# EAGLE board SparkFun_Soil_Moisture_Sensor_Panel_v10 (EAGLE 7.3.0)
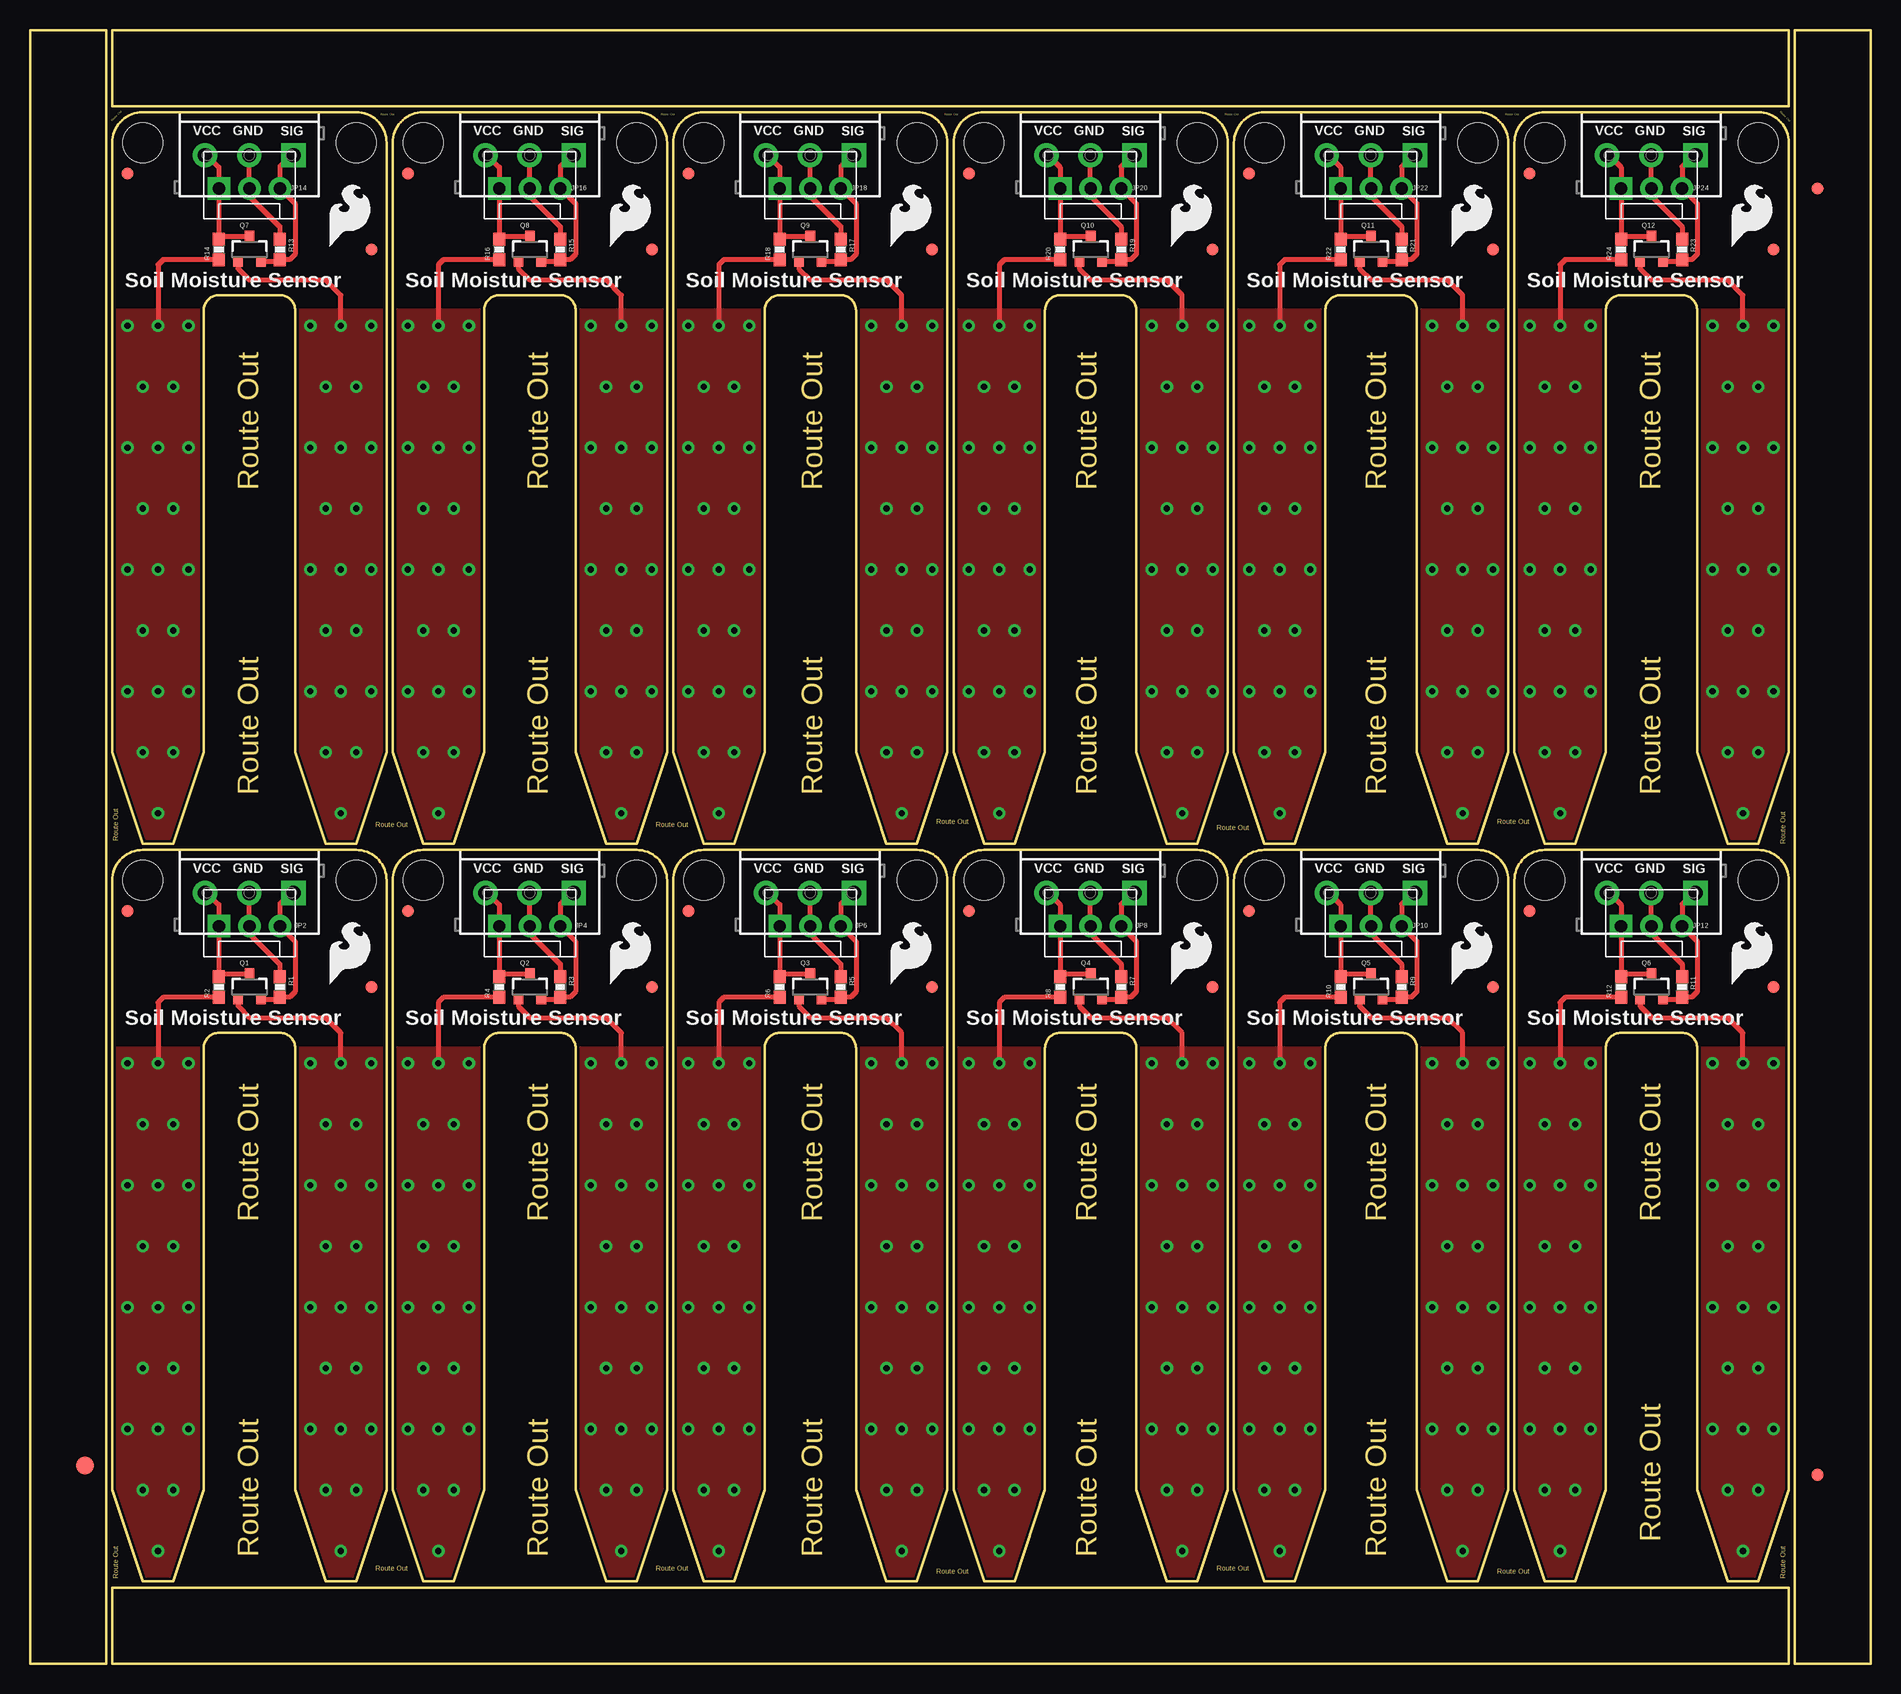
[diagram p0: board, top side]
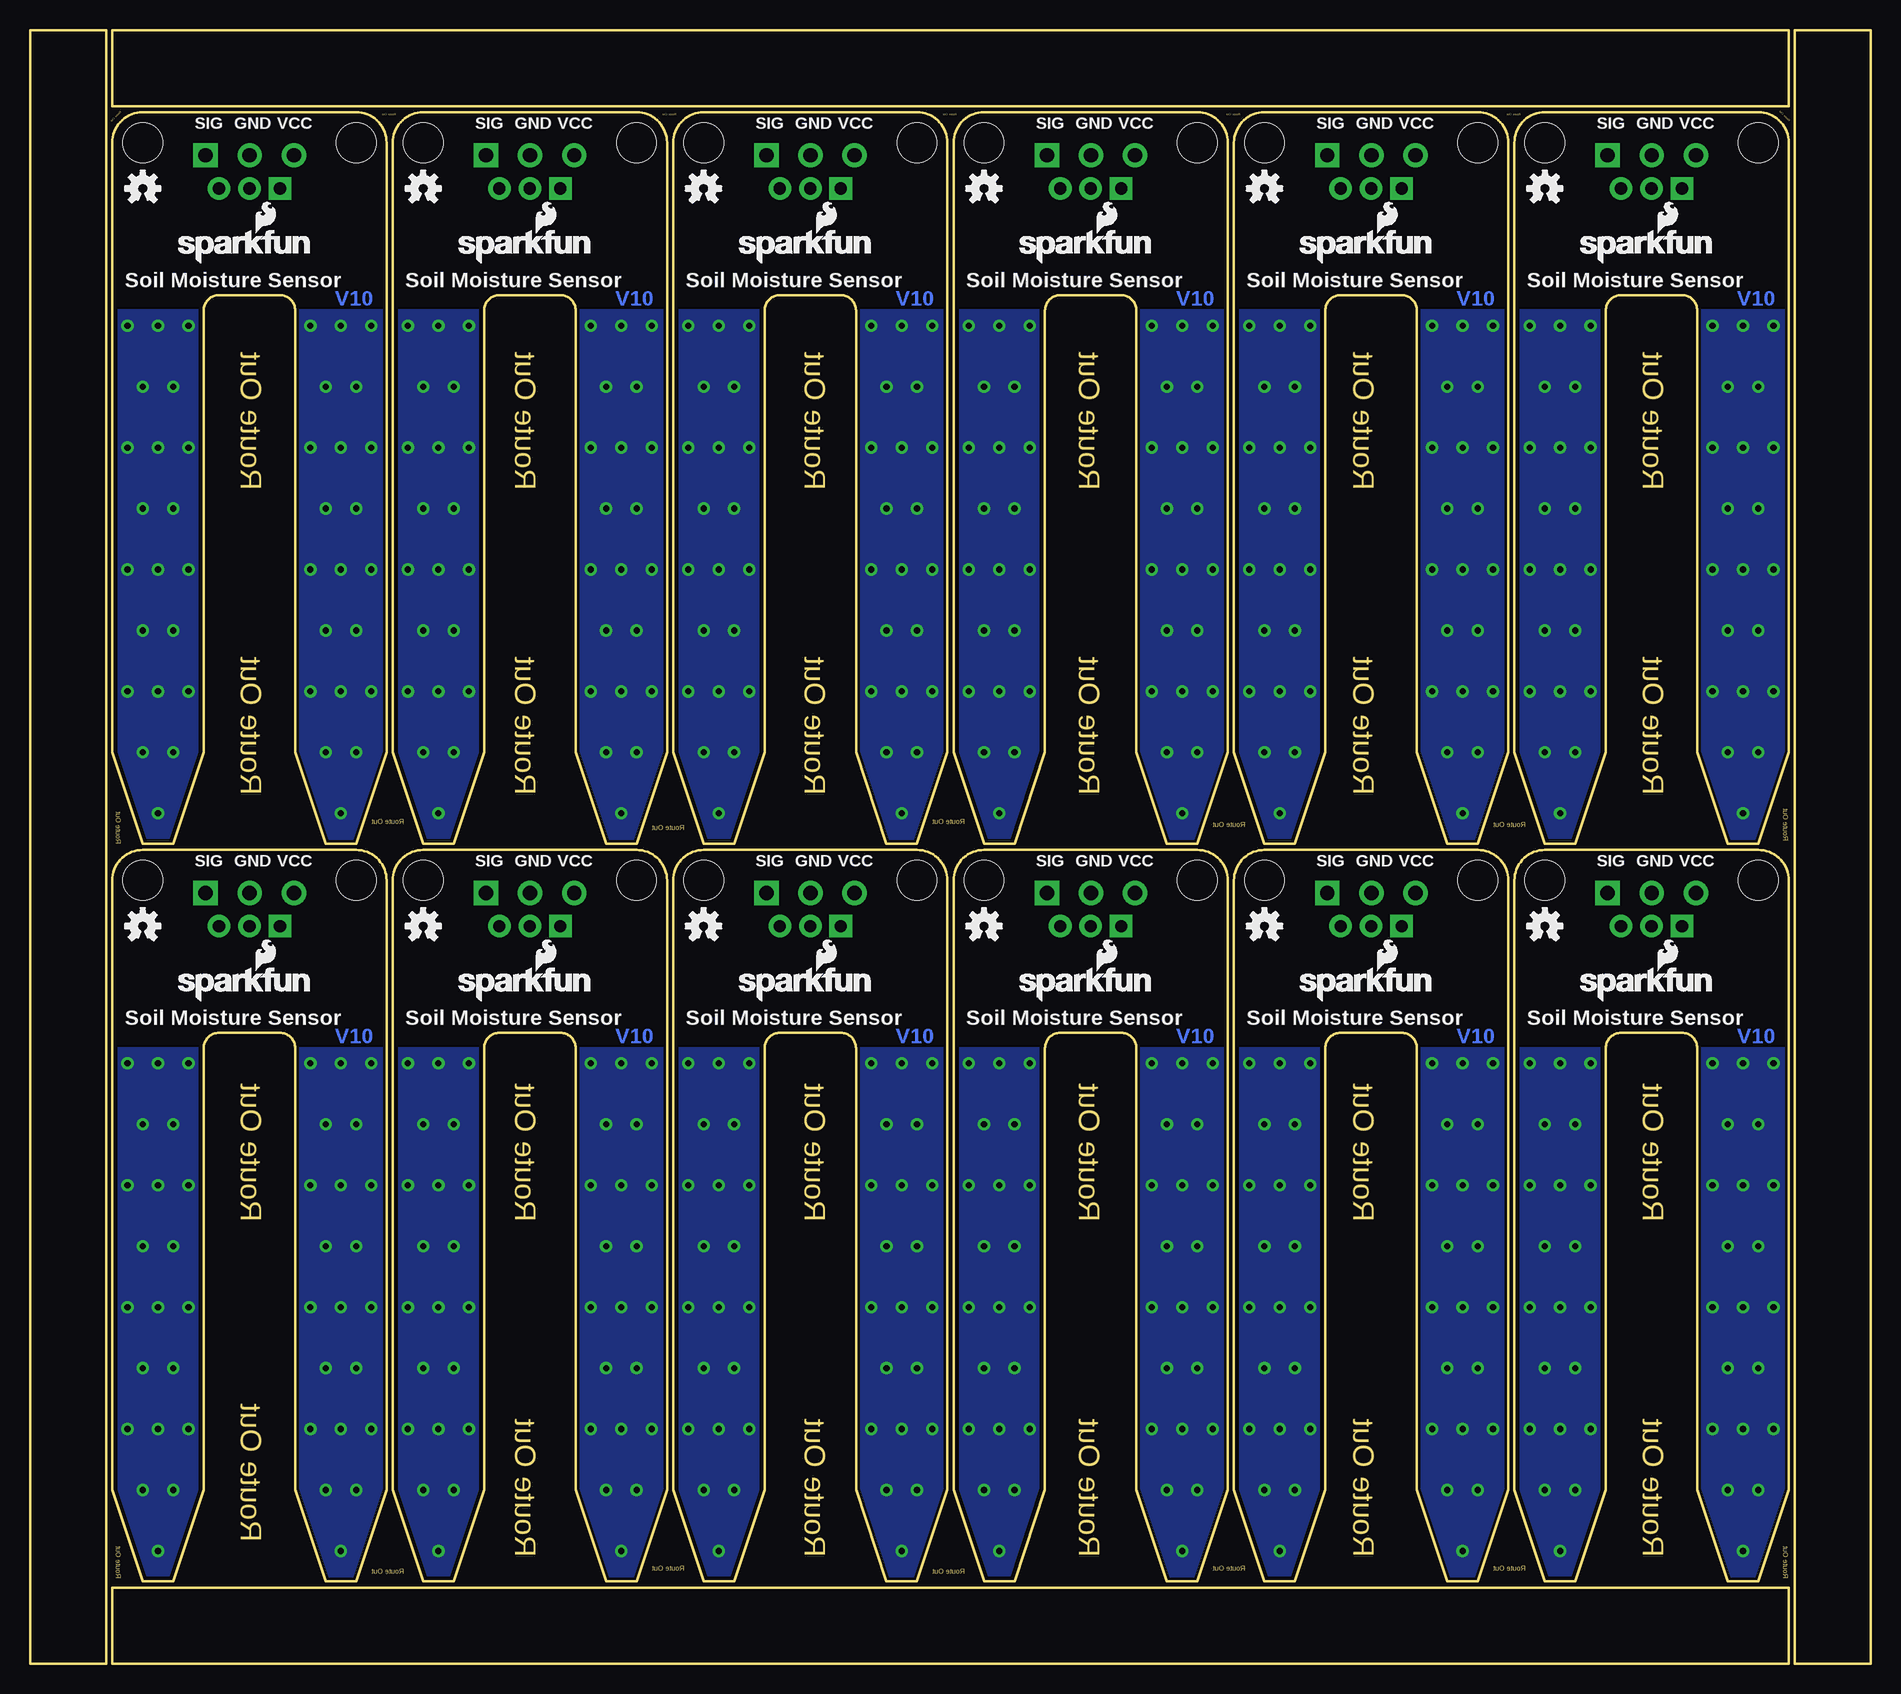
[diagram p1: board, bottom side, seen from below]

Size 153.42 x 136.14 mm. Coordinates in mm from the lower left corner, seen from the top.
Outline: 9.4,67.82 arc90 6.86,65.28 6.86,14.48 9.4,6.86 11.94,6.86 14.48,14.48 14.48,51.31 arc-90 15.75,52.58 20.83,52.58 arc-90 22.1,51.31 22.1,14.48 24.64,6.86 27.18,6.86 29.72,14.48 29.72,65.28 arc90 27.18,67.82 9.4,67.82
Outline: 32.77,67.82 arc90 30.23,65.28 30.23,14.48 32.77,6.86 35.31,6.86 37.85,14.48 37.85,51.31 arc-90 39.12,52.58 44.2,52.58 arc-90 45.47,51.31 45.47,14.48 48.01,6.86 50.55,6.86 53.09,14.48 53.09,65.28 arc90 50.55,67.82 32.77,67.82
Outline: 56.13,67.82 arc90 53.59,65.28 53.59,14.48 56.13,6.86 58.67,6.86 61.21,14.48 61.21,51.31 arc-90 62.48,52.58 67.56,52.58 arc-90 68.83,51.31 68.83,14.48 71.37,6.86 73.91,6.86 76.45,14.48 76.45,65.28 arc90 73.91,67.82 56.13,67.82
Outline: 79.5,67.82 arc90 76.96,65.28 76.96,14.48 79.5,6.86 82.04,6.86 84.58,14.48 84.58,51.31 arc-90 85.85,52.58 90.93,52.58 arc-90 92.2,51.31 92.2,14.48 94.74,6.86 97.28,6.86 99.82,14.48 99.82,65.28 arc90 97.28,67.82 79.5,67.82
Outline: 102.87,67.82 arc90 100.33,65.28 100.33,14.48 102.87,6.86 105.41,6.86 107.95,14.48 107.95,51.31 arc-90 109.22,52.58 114.3,52.58 arc-90 115.57,51.31 115.57,14.48 118.11,6.86 120.65,6.86 123.19,14.48 123.19,65.28 arc90 120.65,67.82 102.87,67.82
Outline: 126.24,67.82 arc90 123.7,65.28 123.7,14.48 126.24,6.86 128.78,6.86 131.32,14.48 131.32,51.31 arc-90 132.59,52.58 137.67,52.58 arc-90 138.94,51.31 138.94,14.48 141.48,6.86 144.02,6.86 146.56,14.48 146.56,65.28 arc90 144.02,67.82 126.24,67.82
Outline: 9.4,129.29 arc90 6.86,126.75 6.86,75.95 9.4,68.33 11.94,68.33 14.48,75.95 14.48,112.78 arc-90 15.75,114.05 20.83,114.05 arc-90 22.1,112.78 22.1,75.95 24.64,68.33 27.18,68.33 29.72,75.95 29.72,126.75 arc90 27.18,129.29 9.4,129.29
Outline: 32.77,129.29 arc90 30.23,126.75 30.23,75.95 32.77,68.33 35.31,68.33 37.85,75.95 37.85,112.78 arc-90 39.12,114.05 44.2,114.05 arc-90 45.47,112.78 45.47,75.95 48.01,68.33 50.55,68.33 53.09,75.95 53.09,126.75 arc90 50.55,129.29 32.77,129.29
Outline: 56.13,129.29 arc90 53.59,126.75 53.59,75.95 56.13,68.33 58.67,68.33 61.21,75.95 61.21,112.78 arc-90 62.48,114.05 67.56,114.05 arc-90 68.83,112.78 68.83,75.95 71.37,68.33 73.91,68.33 76.45,75.95 76.45,126.75 arc90 73.91,129.29 56.13,129.29
Outline: 79.5,129.29 arc90 76.96,126.75 76.96,75.95 79.5,68.33 82.04,68.33 84.58,75.95 84.58,112.78 arc-90 85.85,114.05 90.93,114.05 arc-90 92.2,112.78 92.2,75.95 94.74,68.33 97.28,68.33 99.82,75.95 99.82,126.75 arc90 97.28,129.29 79.5,129.29
Outline: 102.87,129.29 arc90 100.33,126.75 100.33,75.95 102.87,68.33 105.41,68.33 107.95,75.95 107.95,112.78 arc-90 109.22,114.05 114.3,114.05 arc-90 115.57,112.78 115.57,75.95 118.11,68.33 120.65,68.33 123.19,75.95 123.19,126.75 arc90 120.65,129.29 102.87,129.29
Outline: 126.24,129.29 arc90 123.7,126.75 123.7,75.95 126.24,68.33 128.78,68.33 131.32,75.95 131.32,112.78 arc-90 132.59,114.05 137.67,114.05 arc-90 138.94,112.78 138.94,75.95 141.48,68.33 144.02,68.33 146.56,75.95 146.56,126.75 arc90 144.02,129.29 126.24,129.29
Outline: 6.35,0 6.35,136.14 0,136.14 0,0 6.35,0
Outline: 6.86,0 146.56,0 146.56,6.35 6.86,6.35 6.86,0
Outline: 153.42,0 153.42,136.14 147.07,136.14 147.07,0 153.42,0
Outline: 146.56,136.14 6.86,136.14 6.86,129.79 146.56,129.79 146.56,136.14
Copper layers (1*16): Top 0.035mm / dielectric 1.5mm / Bottom 0.035mm
Design rules "SparkFun-2-layer": minimum track width 7mil, minimum drill 15mil, track to track 8mil, track to pad 8mil, pad to pad 8mil, via to via 8mil, smd to smd 8mil, copper to edge 8mil, drill to drill 8mil, minimum pad ring 12mil, minimum via ring 10mil, stop-mask expansion 4mil, vias tented up to drill 20mil, thermal gap 10mil

## Footprints (pad centres in the part's own frame; a part is rotated, then mirrored left to right if it is on the bottom)
FIDUCIAL-1.5X3 = smd 1.5 x 1.5: 1 0,0
FIDUCIAL-1X2 = smd 1 x 1: 1 0,0
MOLEX-1X3 = drill 1.016 pad 1.88 square: 1 0,0 | drill 1.016 pad 1.88: 2 2.54,0; 3 5.08,0
SCREWTERMINAL-3.5MM-3_LOCK.007S = drill 1.2 pad 2.032 square: 1 -0.178,0 | drill 1.2 pad 2.032: 2 3.5,0; 3 7.178,0
SOT23-3 = smd 0.8 x 0.9: 1 -0.95,-1; 2 0.95,-1; 3 0,1.1
0603-RES = smd 1.1 x 1: 1 -0.85,0; 2 0.85,0
STAND-OFF = hole 3.302: 0,0

## Placement (x,y rotation side)
E$1  [FIDUCIAL-1.5X3]  4.57,16.51 0 top
E$4  [FIDUCIAL-1X2]  148.97,15.75 0 top
E$5  [FIDUCIAL-1X2]  148.97,122.94 180 top
FID1  FIDUCIAL1X2  [FIDUCIAL-1X2]  8.13,62.74 0 top
FID2  FIDUCIAL1X2  [FIDUCIAL-1X2]  28.45,56.39 0 top
FID3  FIDUCIAL1X2  [FIDUCIAL-1X2]  31.5,62.74 0 top
FID4  FIDUCIAL1X2  [FIDUCIAL-1X2]  51.82,56.39 0 top
FID5  FIDUCIAL1X2  [FIDUCIAL-1X2]  54.86,62.74 0 top
FID6  FIDUCIAL1X2  [FIDUCIAL-1X2]  75.18,56.39 0 top
FID7  FIDUCIAL1X2  [FIDUCIAL-1X2]  78.23,62.74 0 top
FID8  FIDUCIAL1X2  [FIDUCIAL-1X2]  98.55,56.39 0 top
FID9  FIDUCIAL1X2  [FIDUCIAL-1X2]  101.6,62.74 0 top
FID10  FIDUCIAL1X2  [FIDUCIAL-1X2]  121.92,56.39 0 top
FID11  FIDUCIAL1X2  [FIDUCIAL-1X2]  124.97,62.74 0 top
FID12  FIDUCIAL1X2  [FIDUCIAL-1X2]  145.29,56.39 0 top
FID13  FIDUCIAL1X2  [FIDUCIAL-1X2]  8.13,124.21 0 top
FID14  FIDUCIAL1X2  [FIDUCIAL-1X2]  28.45,117.86 0 top
FID15  FIDUCIAL1X2  [FIDUCIAL-1X2]  31.5,124.21 0 top
FID16  FIDUCIAL1X2  [FIDUCIAL-1X2]  51.82,117.86 0 top
FID17  FIDUCIAL1X2  [FIDUCIAL-1X2]  54.86,124.21 0 top
FID18  FIDUCIAL1X2  [FIDUCIAL-1X2]  75.18,117.86 0 top
FID19  FIDUCIAL1X2  [FIDUCIAL-1X2]  78.23,124.21 0 top
FID20  FIDUCIAL1X2  [FIDUCIAL-1X2]  98.55,117.86 0 top
FID21  FIDUCIAL1X2  [FIDUCIAL-1X2]  101.6,124.21 0 top
FID22  FIDUCIAL1X2  [FIDUCIAL-1X2]  121.92,117.86 0 top
FID23  FIDUCIAL1X2  [FIDUCIAL-1X2]  124.97,124.21 0 top
FID24  FIDUCIAL1X2  [FIDUCIAL-1X2]  145.29,117.86 0 top
JP1  DNP  [MOLEX-1X3]  15.75,61.47 0 top
JP2  [SCREWTERMINAL-3.5MM-3_LOCK.007S]  21.77,64.24 180 top
JP3  DNP  [MOLEX-1X3]  39.12,61.47 0 top
JP4  [SCREWTERMINAL-3.5MM-3_LOCK.007S]  45.14,64.24 180 top
JP5  DNP  [MOLEX-1X3]  62.48,61.47 0 top
JP6  [SCREWTERMINAL-3.5MM-3_LOCK.007S]  68.5,64.24 180 top
JP7  DNP  [MOLEX-1X3]  85.85,61.47 0 top
JP8  [SCREWTERMINAL-3.5MM-3_LOCK.007S]  91.87,64.24 180 top
JP9  DNP  [MOLEX-1X3]  109.22,61.47 0 top
JP10  [SCREWTERMINAL-3.5MM-3_LOCK.007S]  115.24,64.24 180 top
JP11  DNP  [MOLEX-1X3]  132.59,61.47 0 top
JP12  [SCREWTERMINAL-3.5MM-3_LOCK.007S]  138.61,64.24 180 top
JP13  DNP  [MOLEX-1X3]  15.75,122.94 0 top
JP14  [SCREWTERMINAL-3.5MM-3_LOCK.007S]  21.77,125.7 180 top
JP15  DNP  [MOLEX-1X3]  39.12,122.94 0 top
JP16  [SCREWTERMINAL-3.5MM-3_LOCK.007S]  45.14,125.7 180 top
JP17  DNP  [MOLEX-1X3]  62.48,122.94 0 top
JP18  [SCREWTERMINAL-3.5MM-3_LOCK.007S]  68.5,125.7 180 top
JP19  DNP  [MOLEX-1X3]  85.85,122.94 0 top
JP20  [SCREWTERMINAL-3.5MM-3_LOCK.007S]  91.87,125.7 180 top
JP21  DNP  [MOLEX-1X3]  109.22,122.94 0 top
JP22  [SCREWTERMINAL-3.5MM-3_LOCK.007S]  115.24,125.7 180 top
JP23  DNP  [MOLEX-1X3]  132.59,122.94 0 top
JP24  [SCREWTERMINAL-3.5MM-3_LOCK.007S]  138.61,125.7 180 top
LOGO1  SFE_LOGO_NAME_FLAME.1_INCH  [SFE_LOGO_NAME_FLAME_.1]  24.64,55.12 0 bottom
LOGO2  OSHW-LOGOS  [OSHW-LOGO-S]  27.18,61.47 0 bottom
LOGO3  SFE_LOGO_NAME_FLAME.1_INCH  [SFE_LOGO_NAME_FLAME_.1]  48.01,55.12 0 bottom
LOGO4  OSHW-LOGOS  [OSHW-LOGO-S]  50.55,61.47 0 bottom
LOGO5  SFE_LOGO_NAME_FLAME.1_INCH  [SFE_LOGO_NAME_FLAME_.1]  71.37,55.12 0 bottom
LOGO6  OSHW-LOGOS  [OSHW-LOGO-S]  73.91,61.47 0 bottom
LOGO7  SFE_LOGO_NAME_FLAME.1_INCH  [SFE_LOGO_NAME_FLAME_.1]  94.74,55.12 0 bottom
LOGO8  OSHW-LOGOS  [OSHW-LOGO-S]  97.28,61.47 0 bottom
LOGO9  SFE_LOGO_NAME_FLAME.1_INCH  [SFE_LOGO_NAME_FLAME_.1]  118.11,55.12 0 bottom
LOGO10  OSHW-LOGOS  [OSHW-LOGO-S]  120.65,61.47 0 bottom
LOGO11  SFE_LOGO_NAME_FLAME.1_INCH  [SFE_LOGO_NAME_FLAME_.1]  141.48,55.12 0 bottom
LOGO12  OSHW-LOGOS  [OSHW-LOGO-S]  144.02,61.47 0 bottom
LOGO13  SFE_LOGO_NAME_FLAME.1_INCH  [SFE_LOGO_NAME_FLAME_.1]  24.64,116.59 0 bottom
LOGO14  OSHW-LOGOS  [OSHW-LOGO-S]  27.18,122.94 0 bottom
LOGO15  SFE_LOGO_NAME_FLAME.1_INCH  [SFE_LOGO_NAME_FLAME_.1]  48.01,116.59 0 bottom
LOGO16  OSHW-LOGOS  [OSHW-LOGO-S]  50.55,122.94 0 bottom
LOGO17  SFE_LOGO_NAME_FLAME.1_INCH  [SFE_LOGO_NAME_FLAME_.1]  71.37,116.59 0 bottom
LOGO18  OSHW-LOGOS  [OSHW-LOGO-S]  73.91,122.94 0 bottom
LOGO19  SFE_LOGO_NAME_FLAME.1_INCH  [SFE_LOGO_NAME_FLAME_.1]  94.74,116.59 0 bottom
LOGO20  OSHW-LOGOS  [OSHW-LOGO-S]  97.28,122.94 0 bottom
LOGO21  SFE_LOGO_NAME_FLAME.1_INCH  [SFE_LOGO_NAME_FLAME_.1]  118.11,116.59 0 bottom
LOGO22  OSHW-LOGOS  [OSHW-LOGO-S]  120.65,122.94 0 bottom
LOGO23  SFE_LOGO_NAME_FLAME.1_INCH  [SFE_LOGO_NAME_FLAME_.1]  141.48,116.59 0 bottom
LOGO24  OSHW-LOGOS  [OSHW-LOGO-S]  144.02,122.94 0 bottom
Q1  2N3904  [SOT23-3]  18.29,56.39 0 top
Q2  2N3904  [SOT23-3]  41.66,56.39 0 top
Q3  2N3904  [SOT23-3]  65.02,56.39 0 top
Q4  2N3904  [SOT23-3]  88.39,56.39 0 top
Q5  2N3904  [SOT23-3]  111.76,56.39 0 top
Q6  2N3904  [SOT23-3]  135.13,56.39 0 top
Q7  2N3904  [SOT23-3]  18.29,117.86 0 top
Q8  2N3904  [SOT23-3]  41.66,117.86 0 top
Q9  2N3904  [SOT23-3]  65.02,117.86 0 top
Q10  2N3904  [SOT23-3]  88.39,117.86 0 top
Q11  2N3904  [SOT23-3]  111.76,117.86 0 top
Q12  2N3904  [SOT23-3]  135.13,117.86 0 top
R1  10k  [0603-RES]  20.83,56.39 270 top
R2  100  [0603-RES]  15.75,56.39 90 top
R3  10k  [0603-RES]  44.2,56.39 270 top
R4  100  [0603-RES]  39.12,56.39 90 top
R5  10k  [0603-RES]  67.56,56.39 270 top
R6  100  [0603-RES]  62.48,56.39 90 top
R7  10k  [0603-RES]  90.93,56.39 270 top
R8  100  [0603-RES]  85.85,56.39 90 top
R9  10k  [0603-RES]  114.3,56.39 270 top
R10  100  [0603-RES]  109.22,56.39 90 top
R11  10k  [0603-RES]  137.67,56.39 270 top
R12  100  [0603-RES]  132.59,56.39 90 top
R13  10k  [0603-RES]  20.83,117.86 270 top
R14  100  [0603-RES]  15.75,117.86 90 top
R15  10k  [0603-RES]  44.2,117.86 270 top
R16  100  [0603-RES]  39.12,117.86 90 top
R17  10k  [0603-RES]  67.56,117.86 270 top
R18  100  [0603-RES]  62.48,117.86 90 top
R19  10k  [0603-RES]  90.93,117.86 270 top
R20  100  [0603-RES]  85.85,117.86 90 top
R21  10k  [0603-RES]  114.3,117.86 270 top
R22  100  [0603-RES]  109.22,117.86 90 top
R23  10k  [0603-RES]  137.67,117.86 270 top
R24  100  [0603-RES]  132.59,117.86 90 top
STANDOFF1  STAND-OFF  [STAND-OFF]  9.4,65.28 0 top
STANDOFF2  STAND-OFF  [STAND-OFF]  27.18,65.28 0 top
STANDOFF3  STAND-OFF  [STAND-OFF]  32.77,65.28 0 top
STANDOFF4  STAND-OFF  [STAND-OFF]  50.55,65.28 0 top
STANDOFF5  STAND-OFF  [STAND-OFF]  56.13,65.28 0 top
STANDOFF6  STAND-OFF  [STAND-OFF]  73.91,65.28 0 top
STANDOFF7  STAND-OFF  [STAND-OFF]  79.5,65.28 0 top
STANDOFF8  STAND-OFF  [STAND-OFF]  97.28,65.28 0 top
STANDOFF9  STAND-OFF  [STAND-OFF]  102.87,65.28 0 top
STANDOFF10  STAND-OFF  [STAND-OFF]  120.65,65.28 0 top
STANDOFF11  STAND-OFF  [STAND-OFF]  126.24,65.28 0 top
STANDOFF12  STAND-OFF  [STAND-OFF]  144.02,65.28 0 top
STANDOFF13  STAND-OFF  [STAND-OFF]  9.4,126.75 0 top
STANDOFF14  STAND-OFF  [STAND-OFF]  27.18,126.75 0 top
STANDOFF15  STAND-OFF  [STAND-OFF]  32.77,126.75 0 top
STANDOFF16  STAND-OFF  [STAND-OFF]  50.55,126.75 0 top
STANDOFF17  STAND-OFF  [STAND-OFF]  56.13,126.75 0 top
STANDOFF18  STAND-OFF  [STAND-OFF]  73.91,126.75 0 top
STANDOFF19  STAND-OFF  [STAND-OFF]  79.5,126.75 0 top
STANDOFF20  STAND-OFF  [STAND-OFF]  97.28,126.75 0 top
STANDOFF21  STAND-OFF  [STAND-OFF]  102.87,126.75 0 top
STANDOFF22  STAND-OFF  [STAND-OFF]  120.65,126.75 0 top
STANDOFF23  STAND-OFF  [STAND-OFF]  126.24,126.75 0 top
STANDOFF24  STAND-OFF  [STAND-OFF]  144.02,126.75 0 top
U$1  [SFE_LOGO_FLAME_.2]  48.01,56.39 0 top
U$2  [SFE_LOGO_FLAME_.2]  71.37,56.39 0 top
U$3  [SFE_LOGO_FLAME_.2]  94.74,56.39 0 top
U$4  [SFE_LOGO_FLAME_.2]  24.64,56.39 0 top
U$5  [SFE_LOGO_FLAME_.2]  118.11,56.39 0 top
U$6  [SFE_LOGO_FLAME_.2]  141.48,56.39 0 top
U$7  [SFE_LOGO_FLAME_.2]  24.64,117.86 0 top
U$8  [SFE_LOGO_FLAME_.2]  48.01,117.86 0 top
U$9  [SFE_LOGO_FLAME_.2]  71.37,117.86 0 top
U$10  [SFE_LOGO_FLAME_.2]  94.74,117.86 0 top
U$11  [SFE_LOGO_FLAME_.2]  118.11,117.86 0 top
U$12  [SFE_LOGO_FLAME_.2]  141.48,117.86 0 top

## Library data of the parts
E$1 = SparkFun-Retired
E$4 E$5 FID1-FID24 LOGO1-LOGO24 U$1-U$12 = SparkFun-Aesthetics
JP1 JP3 JP5 JP7 JP9 JP11 JP13 JP15 JP17 JP19 JP21 JP23 = SparkFun-Connectors
JP2 JP4 JP6 JP8 JP10 JP12 JP14 JP16 JP18 JP20 JP22 JP24 = SparkFun-Connectors; PROD_ID: CONN-08288
Q1-Q12 = SparkFun-DiscreteSemi; PROD_ID: TRANS-08049
R1-R24 = SparkFun-Resistors; PROD_ID: RES-12438
STANDOFF1-STANDOFF24 = SparkFun-Electromechanical

## Nets
GND: JP1.2 JP2.2 R1.1
GND1: JP3.2 JP4.2 R3.1
GND2: JP5.2 JP6.2 R5.1
GND3: JP7.2 JP8.2 R7.1
GND4: JP9.2 JP10.2 R9.1
GND5: JP11.2 JP12.2 R11.1
GND6: JP13.2 JP14.2 R13.1
GND7: JP15.2 JP16.2 R15.1
GND8: JP17.2 JP18.2 R17.1
GND9: JP19.2 JP20.2 R19.1
GND10: JP21.2 JP22.2 R21.1
GND11: JP23.2 JP24.2 R23.1
PROBE1: Q1.1
PROBE2: R2.1
PROBE3: Q2.1
PROBE4: R4.1
PROBE5: Q3.1
PROBE6: R6.1
PROBE7: Q4.1
PROBE8: R8.1
PROBE9: Q5.1
PROBE10: R10.1
PROBE11: Q6.1
PROBE12: R12.1
PROBE13: Q7.1
PROBE14: R14.1
PROBE15: Q8.1
PROBE16: R16.1
PROBE17: Q9.1
PROBE18: R18.1
PROBE19: Q10.1
PROBE20: R20.1
PROBE21: Q11.1
PROBE22: R22.1
PROBE23: Q12.1
PROBE24: R24.1
SIG: JP1.3 JP2.1 Q1.2 R1.2
SIG1: JP3.3 JP4.1 Q2.2 R3.2
SIG2: JP5.3 JP6.1 Q3.2 R5.2
SIG3: JP7.3 JP8.1 Q4.2 R7.2
SIG4: JP9.3 JP10.1 Q5.2 R9.2
SIG5: JP11.3 JP12.1 Q6.2 R11.2
SIG6: JP13.3 JP14.1 Q7.2 R13.2
SIG7: JP15.3 JP16.1 Q8.2 R15.2
SIG8: JP17.3 JP18.1 Q9.2 R17.2
SIG9: JP19.3 JP20.1 Q10.2 R19.2
SIG10: JP21.3 JP22.1 Q11.2 R21.2
SIG11: JP23.3 JP24.1 Q12.2 R23.2
VCC: JP1.1 JP2.3 Q1.3 R2.2
VCC1: JP3.1 JP4.3 Q2.3 R4.2
VCC2: JP5.1 JP6.3 Q3.3 R6.2
VCC3: JP7.1 JP8.3 Q4.3 R8.2
VCC4: JP9.1 JP10.3 Q5.3 R10.2
VCC5: JP11.1 JP12.3 Q6.3 R12.2
VCC6: JP13.1 JP14.3 Q7.3 R14.2
VCC7: JP15.1 JP16.3 Q8.3 R16.2
VCC8: JP17.1 JP18.3 Q9.3 R18.2
VCC9: JP19.1 JP20.3 Q10.3 R20.2
VCC10: JP21.1 JP22.3 Q11.3 R22.2
VCC11: JP23.1 JP24.3 Q12.3 R24.2

## Tracks (layer width: path | path; a pad name or v marks a point on that pad's centre or on a via)
GND
  Top 0.254: 18.27,61.49 JP1.2
  Top 0.406: JP1.2 18.29,60.83 20.83,58.29 R1.1 | 18.27,61.49 JP2.2
GND1
  Top 0.254: 41.64,61.49 JP3.2
  Top 0.406: JP3.2 41.66,60.83 44.2,58.29 R3.1 | 41.64,61.49 JP4.2
GND2
  Top 0.254: 65,61.49 JP5.2
  Top 0.406: JP5.2 65.02,60.83 67.56,58.29 R5.1 | 65,61.49 JP6.2
GND3
  Top 0.254: 88.37,61.49 JP7.2
  Top 0.406: JP7.2 88.39,60.83 90.93,58.29 R7.1 | 88.37,61.49 JP8.2
GND4
  Top 0.254: 111.74,61.49 JP9.2
  Top 0.406: JP9.2 111.76,60.83 114.3,58.29 R9.1 | 111.74,61.49 JP10.2
GND5
  Top 0.254: 135.11,61.49 JP11.2
  Top 0.406: JP11.2 135.13,60.83 137.67,58.29 R11.1 | 135.11,61.49 JP12.2
GND6
  Top 0.254: 18.27,122.96 JP13.2
  Top 0.406: JP13.2 18.29,122.3 20.83,119.76 R13.1 | 18.27,122.96 JP14.2
GND7
  Top 0.254: 41.64,122.96 JP15.2
  Top 0.406: JP15.2 41.66,122.3 44.2,119.76 R15.1 | 41.64,122.96 JP16.2
GND8
  Top 0.254: 65,122.96 JP17.2
  Top 0.406: JP17.2 65.02,122.3 67.56,119.76 R17.1 | 65,122.96 JP18.2
GND9
  Top 0.254: 88.37,122.96 JP19.2
  Top 0.406: JP19.2 88.39,122.3 90.93,119.76 R19.1 | 88.37,122.96 JP20.2
GND10
  Top 0.254: 111.74,122.96 JP21.2
  Top 0.406: JP21.2 111.76,122.3 114.3,119.76 R21.1 | 111.74,122.96 JP22.2
GND11
  Top 0.254: 135.11,122.96 JP23.2
  Top 0.406: JP23.2 135.13,122.3 137.67,119.76 R23.1 | 135.11,122.96 JP24.2
PROBE1  (via drill 0.51)
  Top 0.406: Q1.1 17.34,54.8 18.29,53.85 24.64,53.85 25.91,52.58 v25.91,50.04
  other vias: 23.37,50.04 28.45,50.04 28.45,39.88 25.91,39.88 23.37,39.88 23.37,29.72 25.91,29.72 28.45,29.72 28.45,19.56 25.91,19.56 23.37,19.56 24.64,14.48 27.18,14.48 25.91,9.4 24.64,44.96 27.18,44.96 27.18,34.8 24.64,34.8 24.64,24.64 27.18,24.64
  pour Top: 22.1,51.31 22.1,6.86 29.72,6.86 29.72,51.31
  pour Bottom (isolate 0.305): 22.1,51.31 22.1,6.86 29.72,6.86 29.72,51.31
PROBE2  (via drill 0.51)
  Top 0.406: v10.67,50.04 10.67,55.12 11.09,55.54 R2.1
  other vias: 13.21,50.04 8.13,50.04 8.13,39.88 10.67,39.88 13.21,39.88 13.21,29.72 10.67,29.72 8.13,29.72 8.13,19.56 10.67,19.56 13.21,19.56 11.94,14.48 9.4,14.48 10.67,9.4 9.4,24.64 11.94,24.64 9.4,34.8 11.94,34.8 9.4,44.96 11.94,44.96
  pour Top: 6.86,51.31 6.86,6.86 14.48,6.86 14.48,51.31
  pour Bottom: 6.86,51.31 6.86,6.86 14.48,6.86 14.48,51.31
PROBE3  (via drill 0.51)
  Top 0.406: Q2.1 40.71,54.8 41.66,53.85 48.01,53.85 49.28,52.58 v49.28,50.04
  other vias: 46.74,50.04 51.82,50.04 51.82,39.88 49.28,39.88 46.74,39.88 46.74,29.72 49.28,29.72 51.82,29.72 51.82,19.56 49.28,19.56 46.74,19.56 48.01,14.48 50.55,14.48 49.28,9.4 48.01,44.96 50.55,44.96 50.55,34.8 48.01,34.8 48.01,24.64 50.55,24.64
  pour Top: 45.47,51.31 45.47,6.86 53.09,6.86 53.09,51.31
  pour Bottom (isolate 0.305): 45.47,51.31 45.47,6.86 53.09,6.86 53.09,51.31
PROBE4  (via drill 0.51)
  Top 0.406: v34.04,50.04 34.04,55.12 34.46,55.54 R4.1
  other vias: 36.58,50.04 31.5,50.04 31.5,39.88 34.04,39.88 36.58,39.88 36.58,29.72 34.04,29.72 31.5,29.72 31.5,19.56 34.04,19.56 36.58,19.56 35.31,14.48 32.77,14.48 34.04,9.4 32.77,24.64 35.31,24.64 32.77,34.8 35.31,34.8 32.77,44.96 35.31,44.96
  pour Top: 30.23,51.31 30.23,6.86 37.85,6.86 37.85,51.31
  pour Bottom: 30.23,51.31 30.23,6.86 37.85,6.86 37.85,51.31
PROBE5  (via drill 0.51)
  Top 0.406: Q3.1 64.07,54.8 65.02,53.85 71.37,53.85 72.64,52.58 v72.64,50.04
  other vias: 70.1,50.04 75.18,50.04 75.18,39.88 72.64,39.88 70.1,39.88 70.1,29.72 72.64,29.72 75.18,29.72 75.18,19.56 72.64,19.56 70.1,19.56 71.37,14.48 73.91,14.48 72.64,9.4 71.37,44.96 73.91,44.96 73.91,34.8 71.37,34.8 71.37,24.64 73.91,24.64
  pour Top: 68.83,51.31 68.83,6.86 76.45,6.86 76.45,51.31
  pour Bottom (isolate 0.305): 68.83,51.31 68.83,6.86 76.45,6.86 76.45,51.31
PROBE6  (via drill 0.51)
  Top 0.406: v57.4,50.04 57.4,55.12 57.82,55.54 R6.1
  other vias: 59.94,50.04 54.86,50.04 54.86,39.88 57.4,39.88 59.94,39.88 59.94,29.72 57.4,29.72 54.86,29.72 54.86,19.56 57.4,19.56 59.94,19.56 58.67,14.48 56.13,14.48 57.4,9.4 56.13,24.64 58.67,24.64 56.13,34.8 58.67,34.8 56.13,44.96 58.67,44.96
  pour Top: 53.59,51.31 53.59,6.86 61.21,6.86 61.21,51.31
  pour Bottom: 53.59,51.31 53.59,6.86 61.21,6.86 61.21,51.31
PROBE7  (via drill 0.51)
  Top 0.406: Q4.1 87.44,54.8 88.39,53.85 94.74,53.85 96.01,52.58 v96.01,50.04
  other vias: 93.47,50.04 98.55,50.04 98.55,39.88 96.01,39.88 93.47,39.88 93.47,29.72 96.01,29.72 98.55,29.72 98.55,19.56 96.01,19.56 93.47,19.56 94.74,14.48 97.28,14.48 96.01,9.4 94.74,44.96 97.28,44.96 97.28,34.8 94.74,34.8 94.74,24.64 97.28,24.64
  pour Top: 92.2,51.31 92.2,6.86 99.82,6.86 99.82,51.31
  pour Bottom (isolate 0.305): 92.2,51.31 92.2,6.86 99.82,6.86 99.82,51.31
PROBE8  (via drill 0.51)
  Top 0.406: v80.77,50.04 80.77,55.12 81.19,55.54 R8.1
  other vias: 83.31,50.04 78.23,50.04 78.23,39.88 80.77,39.88 83.31,39.88 83.31,29.72 80.77,29.72 78.23,29.72 78.23,19.56 80.77,19.56 83.31,19.56 82.04,14.48 79.5,14.48 80.77,9.4 79.5,24.64 82.04,24.64 79.5,34.8 82.04,34.8 79.5,44.96 82.04,44.96
  pour Top: 76.96,51.31 76.96,6.86 84.58,6.86 84.58,51.31
  pour Bottom: 76.96,51.31 76.96,6.86 84.58,6.86 84.58,51.31
PROBE9  (via drill 0.51)
  Top 0.406: Q5.1 110.81,54.8 111.76,53.85 118.11,53.85 119.38,52.58 v119.38,50.04
  other vias: 116.84,50.04 121.92,50.04 121.92,39.88 119.38,39.88 116.84,39.88 116.84,29.72 119.38,29.72 121.92,29.72 121.92,19.56 119.38,19.56 116.84,19.56 118.11,14.48 120.65,14.48 119.38,9.4 118.11,44.96 120.65,44.96 120.65,34.8 118.11,34.8 118.11,24.64 120.65,24.64
  pour Top: 115.57,51.31 115.57,6.86 123.19,6.86 123.19,51.31
  pour Bottom (isolate 0.305): 115.57,51.31 115.57,6.86 123.19,6.86 123.19,51.31
PROBE10  (via drill 0.51)
  Top 0.406: v104.14,50.04 104.14,55.12 104.56,55.54 R10.1
  other vias: 106.68,50.04 101.6,50.04 101.6,39.88 104.14,39.88 106.68,39.88 106.68,29.72 104.14,29.72 101.6,29.72 101.6,19.56 104.14,19.56 106.68,19.56 105.41,14.48 102.87,14.48 104.14,9.4 102.87,24.64 105.41,24.64 102.87,34.8 105.41,34.8 102.87,44.96 105.41,44.96
  pour Top: 100.33,51.31 100.33,6.86 107.95,6.86 107.95,51.31
  pour Bottom: 100.33,51.31 100.33,6.86 107.95,6.86 107.95,51.31
PROBE11  (via drill 0.51)
  Top 0.406: Q6.1 134.18,54.8 135.13,53.85 141.48,53.85 142.75,52.58 v142.75,50.04
  other vias: 140.21,50.04 145.29,50.04 145.29,39.88 142.75,39.88 140.21,39.88 140.21,29.72 142.75,29.72 145.29,29.72 145.29,19.56 142.75,19.56 140.21,19.56 141.48,14.48 144.02,14.48 142.75,9.4 141.48,44.96 144.02,44.96 144.02,34.8 141.48,34.8 141.48,24.64 144.02,24.64
  pour Top: 138.94,51.31 138.94,6.86 146.56,6.86 146.56,51.31
  pour Bottom (isolate 0.305): 138.94,51.31 138.94,6.86 146.56,6.86 146.56,51.31
PROBE12  (via drill 0.51)
  Top 0.406: v127.51,50.04 127.51,55.12 127.93,55.54 R12.1
  other vias: 130.05,50.04 124.97,50.04 124.97,39.88 127.51,39.88 130.05,39.88 130.05,29.72 127.51,29.72 124.97,29.72 124.97,19.56 127.51,19.56 130.05,19.56 128.78,14.48 126.24,14.48 127.51,9.4 126.24,24.64 128.78,24.64 126.24,34.8 128.78,34.8 126.24,44.96 128.78,44.96
  pour Top: 123.7,51.31 123.7,6.86 131.32,6.86 131.32,51.31
  pour Bottom: 123.7,51.31 123.7,6.86 131.32,6.86 131.32,51.31
PROBE13  (via drill 0.51)
  Top 0.406: Q7.1 17.34,116.27 18.29,115.32 24.64,115.32 25.91,114.05 v25.91,111.51
  other vias: 23.37,111.51 28.45,111.51 28.45,101.35 25.91,101.35 23.37,101.35 23.37,91.19 25.91,91.19 28.45,91.19 28.45,81.03 25.91,81.03 23.37,81.03 24.64,75.95 27.18,75.95 25.91,70.87 24.64,106.43 27.18,106.43 27.18,96.27 24.64,96.27 24.64,86.11 27.18,86.11
  pour Top: 22.1,112.78 22.1,68.33 29.72,68.33 29.72,112.78
  pour Bottom (isolate 0.305): 22.1,112.78 22.1,68.33 29.72,68.33 29.72,112.78
PROBE14  (via drill 0.51)
  Top 0.406: v10.67,111.51 10.67,116.59 11.09,117.01 R14.1
  other vias: 13.21,111.51 8.13,111.51 8.13,101.35 10.67,101.35 13.21,101.35 13.21,91.19 10.67,91.19 8.13,91.19 8.13,81.03 10.67,81.03 13.21,81.03 11.94,75.95 9.4,75.95 10.67,70.87 9.4,86.11 11.94,86.11 9.4,96.27 11.94,96.27 9.4,106.43 11.94,106.43
  pour Top: 6.86,112.78 6.86,68.33 14.48,68.33 14.48,112.78
  pour Bottom: 6.86,112.78 6.86,68.33 14.48,68.33 14.48,112.78
PROBE15  (via drill 0.51)
  Top 0.406: Q8.1 40.71,116.27 41.66,115.32 48.01,115.32 49.28,114.05 v49.28,111.51
  other vias: 46.74,111.51 51.82,111.51 51.82,101.35 49.28,101.35 46.74,101.35 46.74,91.19 49.28,91.19 51.82,91.19 51.82,81.03 49.28,81.03 46.74,81.03 48.01,75.95 50.55,75.95 49.28,70.87 48.01,106.43 50.55,106.43 50.55,96.27 48.01,96.27 48.01,86.11 50.55,86.11
  pour Top: 45.47,112.78 45.47,68.33 53.09,68.33 53.09,112.78
  pour Bottom (isolate 0.305): 45.47,112.78 45.47,68.33 53.09,68.33 53.09,112.78
PROBE16  (via drill 0.51)
  Top 0.406: v34.04,111.51 34.04,116.59 34.46,117.01 R16.1
  other vias: 36.58,111.51 31.5,111.51 31.5,101.35 34.04,101.35 36.58,101.35 36.58,91.19 34.04,91.19 31.5,91.19 31.5,81.03 34.04,81.03 36.58,81.03 35.31,75.95 32.77,75.95 34.04,70.87 32.77,86.11 35.31,86.11 32.77,96.27 35.31,96.27 32.77,106.43 35.31,106.43
  pour Top: 30.23,112.78 30.23,68.33 37.85,68.33 37.85,112.78
  pour Bottom: 30.23,112.78 30.23,68.33 37.85,68.33 37.85,112.78
PROBE17  (via drill 0.51)
  Top 0.406: Q9.1 64.07,116.27 65.02,115.32 71.37,115.32 72.64,114.05 v72.64,111.51
  other vias: 70.1,111.51 75.18,111.51 75.18,101.35 72.64,101.35 70.1,101.35 70.1,91.19 72.64,91.19 75.18,91.19 75.18,81.03 72.64,81.03 70.1,81.03 71.37,75.95 73.91,75.95 72.64,70.87 71.37,106.43 73.91,106.43 73.91,96.27 71.37,96.27 71.37,86.11 73.91,86.11
  pour Top: 68.83,112.78 68.83,68.33 76.45,68.33 76.45,112.78
  pour Bottom (isolate 0.305): 68.83,112.78 68.83,68.33 76.45,68.33 76.45,112.78
PROBE18  (via drill 0.51)
  Top 0.406: v57.4,111.51 57.4,116.59 57.82,117.01 R18.1
  other vias: 59.94,111.51 54.86,111.51 54.86,101.35 57.4,101.35 59.94,101.35 59.94,91.19 57.4,91.19 54.86,91.19 54.86,81.03 57.4,81.03 59.94,81.03 58.67,75.95 56.13,75.95 57.4,70.87 56.13,86.11 58.67,86.11 56.13,96.27 58.67,96.27 56.13,106.43 58.67,106.43
  pour Top: 53.59,112.78 53.59,68.33 61.21,68.33 61.21,112.78
  pour Bottom: 53.59,112.78 53.59,68.33 61.21,68.33 61.21,112.78
PROBE19  (via drill 0.51)
  Top 0.406: Q10.1 87.44,116.27 88.39,115.32 94.74,115.32 96.01,114.05 v96.01,111.51
  other vias: 93.47,111.51 98.55,111.51 98.55,101.35 96.01,101.35 93.47,101.35 93.47,91.19 96.01,91.19 98.55,91.19 98.55,81.03 96.01,81.03 93.47,81.03 94.74,75.95 97.28,75.95 96.01,70.87 94.74,106.43 97.28,106.43 97.28,96.27 94.74,96.27 94.74,86.11 97.28,86.11
  pour Top: 92.2,112.78 92.2,68.33 99.82,68.33 99.82,112.78
  pour Bottom (isolate 0.305): 92.2,112.78 92.2,68.33 99.82,68.33 99.82,112.78
PROBE20  (via drill 0.51)
  Top 0.406: v80.77,111.51 80.77,116.59 81.19,117.01 R20.1
  other vias: 83.31,111.51 78.23,111.51 78.23,101.35 80.77,101.35 83.31,101.35 83.31,91.19 80.77,91.19 78.23,91.19 78.23,81.03 80.77,81.03 83.31,81.03 82.04,75.95 79.5,75.95 80.77,70.87 79.5,86.11 82.04,86.11 79.5,96.27 82.04,96.27 79.5,106.43 82.04,106.43
  pour Top: 76.96,112.78 76.96,68.33 84.58,68.33 84.58,112.78
  pour Bottom: 76.96,112.78 76.96,68.33 84.58,68.33 84.58,112.78
PROBE21  (via drill 0.51)
  Top 0.406: Q11.1 110.81,116.27 111.76,115.32 118.11,115.32 119.38,114.05 v119.38,111.51
  other vias: 116.84,111.51 121.92,111.51 121.92,101.35 119.38,101.35 116.84,101.35 116.84,91.19 119.38,91.19 121.92,91.19 121.92,81.03 119.38,81.03 116.84,81.03 118.11,75.95 120.65,75.95 119.38,70.87 118.11,106.43 120.65,106.43 120.65,96.27 118.11,96.27 118.11,86.11 120.65,86.11
  pour Top: 115.57,112.78 115.57,68.33 123.19,68.33 123.19,112.78
  pour Bottom (isolate 0.305): 115.57,112.78 115.57,68.33 123.19,68.33 123.19,112.78
PROBE22  (via drill 0.51)
  Top 0.406: v104.14,111.51 104.14,116.59 104.56,117.01 R22.1
  other vias: 106.68,111.51 101.6,111.51 101.6,101.35 104.14,101.35 106.68,101.35 106.68,91.19 104.14,91.19 101.6,91.19 101.6,81.03 104.14,81.03 106.68,81.03 105.41,75.95 102.87,75.95 104.14,70.87 102.87,86.11 105.41,86.11 102.87,96.27 105.41,96.27 102.87,106.43 105.41,106.43
  pour Top: 100.33,112.78 100.33,68.33 107.95,68.33 107.95,112.78
  pour Bottom: 100.33,112.78 100.33,68.33 107.95,68.33 107.95,112.78
PROBE23  (via drill 0.51)
  Top 0.406: Q12.1 134.18,116.27 135.13,115.32 141.48,115.32 142.75,114.05 v142.75,111.51
  other vias: 140.21,111.51 145.29,111.51 145.29,101.35 142.75,101.35 140.21,101.35 140.21,91.19 142.75,91.19 145.29,91.19 145.29,81.03 142.75,81.03 140.21,81.03 141.48,75.95 144.02,75.95 142.75,70.87 141.48,106.43 144.02,106.43 144.02,96.27 141.48,96.27 141.48,86.11 144.02,86.11
  pour Top: 138.94,112.78 138.94,68.33 146.56,68.33 146.56,112.78
  pour Bottom (isolate 0.305): 138.94,112.78 138.94,68.33 146.56,68.33 146.56,112.78
PROBE24  (via drill 0.51)
  Top 0.406: v127.51,111.51 127.51,116.59 127.93,117.01 R24.1
  other vias: 130.05,111.51 124.97,111.51 124.97,101.35 127.51,101.35 130.05,101.35 130.05,91.19 127.51,91.19 124.97,91.19 124.97,81.03 127.51,81.03 130.05,81.03 128.78,75.95 126.24,75.95 127.51,70.87 126.24,86.11 128.78,86.11 126.24,96.27 128.78,96.27 126.24,106.43 128.78,106.43
  pour Top: 123.7,112.78 123.7,68.33 131.32,68.33 131.32,112.78
  pour Bottom: 123.7,112.78 123.7,68.33 131.32,68.33 131.32,112.78
SIG
  Top 0.254: 20.68,55.39 R1.2
  Top 0.406: Q1.2 20.68,55.39 | R1.2 21.64,55.55 22.1,56.01 22.1,60.2 JP1.3 20.83,63.3 21.77,64.24 JP2.1
SIG1
  Top 0.254: 44.05,55.39 R3.2
  Top 0.406: Q2.2 44.05,55.39 | R3.2 45.01,55.55 45.47,56.01 45.47,60.2 JP3.3 44.2,63.3 45.14,64.24 JP4.1
SIG2
  Top 0.254: 67.41,55.39 R5.2 67.58,55.55
  Top 0.406: Q3.2 67.41,55.39 | 67.58,55.55 68.38,55.55 68.83,56.01 68.83,60.2 JP5.3 67.56,63.3 68.5,64.24 JP6.1
SIG3
  Top 0.254: 90.78,55.39 R7.2 90.94,55.55
  Top 0.406: Q4.2 90.78,55.39 | 90.94,55.55 91.75,55.55 92.2,56.01 92.2,60.2 JP7.3 90.93,63.3 91.87,64.24 JP8.1
SIG4
  Top 0.254: 114.15,55.39 R9.2 114.31,55.55
  Top 0.406: Q5.2 114.15,55.39 | 114.31,55.55 115.11,55.55 115.57,56.01 115.57,60.2 JP9.3 114.3,63.3 115.24,64.24 JP10.1
SIG5
  Top 0.254: 137.52,55.39 R11.2
  Top 0.406: Q6.2 137.52,55.39 | R11.2 138.48,55.55 138.94,56.01 138.94,60.2 JP11.3 137.67,63.3 138.61,64.24 JP12.1
SIG6
  Top 0.254: 20.68,116.86 R13.2
  Top 0.406: Q7.2 20.68,116.86 | R13.2 21.64,117.02 22.1,117.47 22.1,121.67 JP13.3 20.83,124.77 21.77,125.7 JP14.1
SIG7
  Top 0.254: 44.05,116.86 R15.2
  Top 0.406: Q8.2 44.05,116.86 | R15.2 45.01,117.02 45.47,117.47 45.47,121.67 JP15.3 44.2,124.77 45.14,125.7 JP16.1
SIG8
  Top 0.254: 67.41,116.86 R17.2 67.58,117.02
  Top 0.406: Q9.2 67.41,116.86 | 67.58,117.02 68.38,117.02 68.83,117.47 68.83,121.67 JP17.3 67.56,124.77 68.5,125.7 JP18.1
SIG9
  Top 0.254: 90.78,116.86 R19.2 90.94,117.02
  Top 0.406: Q10.2 90.78,116.86 | 90.94,117.02 91.75,117.02 92.2,117.47 92.2,121.67 JP19.3 90.93,124.77 91.87,125.7 JP20.1
SIG10
  Top 0.254: 114.15,116.86 R21.2 114.31,117.02
  Top 0.406: Q11.2 114.15,116.86 | 114.31,117.02 115.11,117.02 115.57,117.47 115.57,121.67 JP21.3 114.3,124.77 115.24,125.7 JP22.1
SIG11
  Top 0.254: 137.52,116.86 R23.2
  Top 0.406: Q12.2 137.52,116.86 | R23.2 138.48,117.02 138.94,117.47 138.94,121.67 JP23.3 137.67,124.77 138.61,125.7 JP24.1
VCC
  Top 0.254: R2.2 16,57.49
  Top 0.406: 16,57.49 Q1.3 | R2.2 JP1.1 15.75,63.26 14.77,64.24 JP2.3
VCC1
  Top 0.254: R4.2 39.37,57.49
  Top 0.406: 39.37,57.49 Q2.3 | R4.2 JP3.1 39.12,63.26 38.14,64.24 JP4.3
VCC2
  Top 0.254: R6.2 62.73,57.49
  Top 0.406: 62.73,57.49 Q3.3 | R6.2 JP5.1 62.48,63.26 61.5,64.24 JP6.3
VCC3
  Top 0.254: R8.2 86.1,57.49
  Top 0.406: 86.1,57.49 Q4.3 | R8.2 JP7.1 85.85,63.26 84.87,64.24 JP8.3
VCC4
  Top 0.254: R10.2 109.47,57.49
  Top 0.406: 109.47,57.49 Q5.3 | R10.2 JP9.1 109.22,63.26 108.24,64.24 JP10.3
VCC5
  Top 0.254: R12.2 132.84,57.49
  Top 0.406: 132.84,57.49 Q6.3 | R12.2 JP11.1 132.59,63.26 131.61,64.24 JP12.3
VCC6
  Top 0.254: R14.2 16,118.96
  Top 0.406: 16,118.96 Q7.3 | R14.2 JP13.1 15.75,124.72 14.77,125.7 JP14.3
VCC7
  Top 0.254: R16.2 39.37,118.96
  Top 0.406: 39.37,118.96 Q8.3 | R16.2 JP15.1 39.12,124.72 38.14,125.7 JP16.3
VCC8
  Top 0.254: R18.2 62.73,118.96
  Top 0.406: 62.73,118.96 Q9.3 | R18.2 JP17.1 62.48,124.72 61.5,125.7 JP18.3
VCC9
  Top 0.254: R20.2 86.1,118.96
  Top 0.406: 86.1,118.96 Q10.3 | R20.2 JP19.1 85.85,124.72 84.87,125.7 JP20.3
VCC10
  Top 0.254: R22.2 109.47,118.96
  Top 0.406: 109.47,118.96 Q11.3 | R22.2 JP21.1 109.22,124.72 108.24,125.7 JP22.3
VCC11
  Top 0.254: R24.2 132.84,118.96
  Top 0.406: 132.84,118.96 Q12.3 | R24.2 JP23.1 132.59,124.72 131.61,125.7 JP24.3

## Text on the board
Bottom: V10 | V10 | V10 | V10 | V10 | V10 | V10 | V10 | V10 | V10 | V10 | V10
Dimension: Route Out | Route Out | Route Out | Route Out | Route Out | Route Out | Route Out | Route Out | Route Out | Route Out | Route Out | Route Out | Route Out | Route Out | Route Out | Route Out | Route Out | Route Out | Route Out | Route Out | Route Out | Route Out | Route Out | Route Out | Route Out | Route Out | Route Out | Route Out | Route Out | Route Out | Route Out | Route Out | Route Out | Route Out | Route Out | Route Out | Route Out | Route Out | Route Out | Route Out | Route Out | Route Out | Route Out | Route Out | Route Out
tPlace: VCC | GND | SIG | VCC | GND | SIG | VCC | GND | SIG | VCC | GND | SIG | VCC | GND | SIG | VCC | GND | SIG | Soil Moisture Sensor | Soil Moisture Sensor | Soil Moisture Sensor | Soil Moisture Sensor | Soil Moisture Sensor | Soil Moisture Sensor | VCC | GND | SIG | VCC | GND | SIG | VCC | GND | SIG | VCC | GND | SIG | VCC | GND | SIG | VCC | GND | SIG | Soil Moisture Sensor | Soil Moisture Sensor | Soil Moisture Sensor | Soil Moisture Sensor | Soil Moisture Sensor | Soil Moisture Sensor
bPlace: VCC | GND | SIG | VCC | GND | SIG | VCC | GND | SIG | VCC | GND | SIG | VCC | GND | SIG | VCC | GND | SIG | Soil Moisture Sensor | Soil Moisture Sensor | Soil Moisture Sensor | Soil Moisture Sensor | Soil Moisture Sensor | Soil Moisture Sensor | VCC | GND | SIG | VCC | GND | SIG | VCC | GND | SIG | VCC | GND | SIG | VCC | GND | SIG | VCC | GND | SIG | Soil Moisture Sensor | Soil Moisture Sensor | Soil Moisture Sensor | Soil Moisture Sensor | Soil Moisture Sensor | Soil Moisture Sensor